# EAGLE board trigger_in_board (EAGLE 9.5.1)
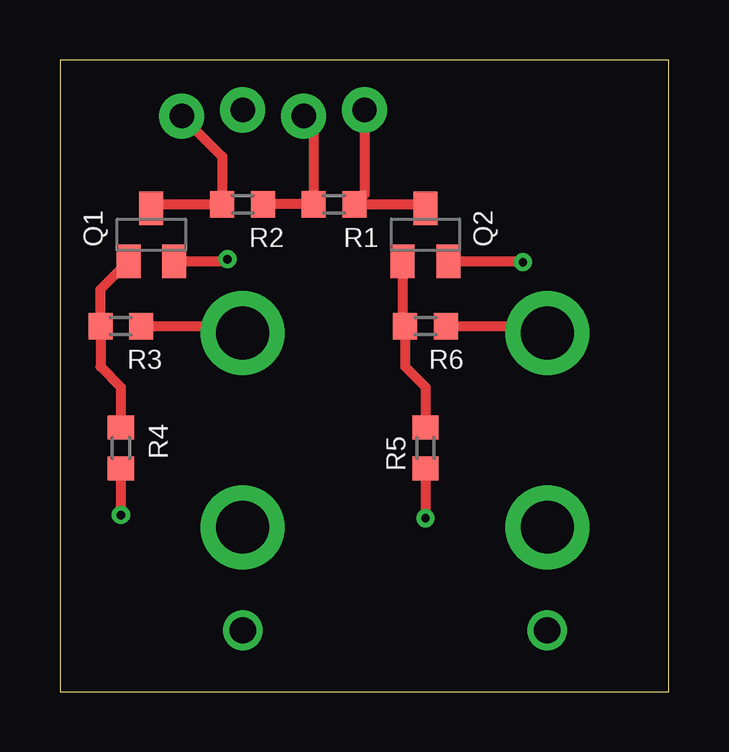
[diagram p0: board, top side]
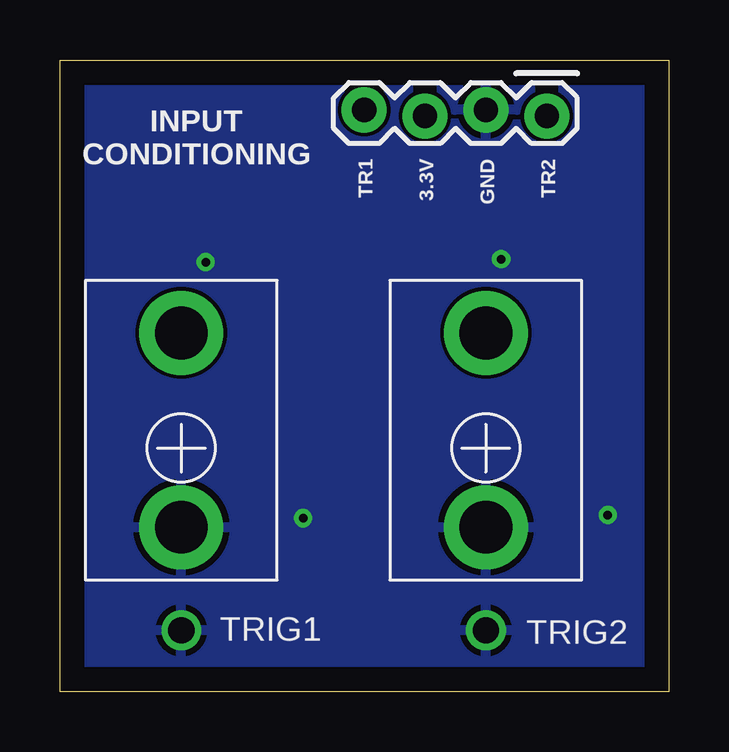
[diagram p1: board, bottom side, seen from below]

Size 25.38 x 26.34 mm. Coordinates in mm from the lower left corner, seen from the top.
Outline: 0,0 25.38,0 25.38,26.34 0,26.34 0,0
Copper layers (1*16): Top 0.035mm / dielectric 1.5mm / Bottom 0.035mm
Design rules "default": minimum track width 6mil, minimum drill 0.35mm, track to track 6mil, track to pad 6mil, pad to pad 6mil, via to via 6mil, smd to smd 6mil, copper to edge 40mil, drill to drill 6mil, minimum pad ring 10mil, minimum via ring 8mil, stop-mask expansion 4mil, vias tented up to drill 0mil, thermal gap 10mil

## Footprints (pad centres in the part's own frame; a part is rotated, then mirrored left to right if it is on the bottom)
1X04_LOCK = drill 1.016 pad 1.88: 1 0,0.127; 2 2.54,-0.127; 3 5.08,0.127; 4 7.62,-0.127
TRANSISTOR_SOT23-BEC = smd 1 x 1.4: B -0.95,-1.1; C 0,1.1; E 0.95,-1.1
R0603 = smd 1 x 1.1: 1 -0.85,0; 2 0.85,0
KOBICONN_PJM301DM_JACK = drill 2.2 pad 3.5: P$1 0,4.8; P$2 0,-3.3 | drill 1.1: P$3 0,-7.6

## Placement (x,y rotation side)
J1  [1X04_LOCK]  5.08,24.13 180 bottom
Q1  MMBT3904LT1G  [TRANSISTOR_SOT23-BEC]  3.81,19.05 0 top
Q2  MMBT3904LT1G  [TRANSISTOR_SOT23-BEC]  15.24,19.05 0 top
R1  47k  [R0603]  11.43,20.32 180 top
R2  47k  [R0603]  7.62,20.32 0 top
R3  100k  [R0603]  2.54,15.24 0 top
R4  33k  [R0603]  2.54,10.16 270 top
R5  33k  [R0603]  15.24,10.16 270 top
R6  100k  [R0603]  15.24,15.24 0 top
TRIG1  [KOBICONN_PJM301DM_JACK]  20.32,10.16 0 bottom
TRIG2  [KOBICONN_PJM301DM_JACK]  7.62,10.16 0 bottom

## Library data of the parts
J1 = SparkFun-Connectors; PROD_ID: CONN-09696
Q1 Q2 = braids_v50
R1-R6 = rcl; SPICEPREFIX: R
TRIG1 TRIG2 = 0000-master

## Nets
3V3_D: J1.3 R1.2 R2.2
GND: J1.2 Q1.E Q2.E R4.2 R5.2 TRIG1.P$2 TRIG1.P$3 TRIG2.P$2 TRIG2.P$3
N$18: R6.2 TRIG1.P$1
N$19: Q2.B R5.1 R6.1
N$20: R3.2 TRIG2.P$1
N$21: Q1.B R3.1 R4.1
TR1: J1.4 Q2.C R1.1
TR2: J1.1 Q1.C R2.1

## Tracks (layer width: path | path; a pad name or v marks a point on that pad's centre or on a via)
3V3_D
  Top 0.406: R2.2 R1.2 10.58,23.58 J1.3
GND  (via drill 0.35)
  Top 0.406: Q1.E 7.07,17.95 v6.99,18.03 | Q2.E 19.3,17.95 v19.3,17.91 | R5.2 v15.24,7.24 | R4.2 v2.54,7.37
  pour Bottom: 0,0 0,26.67 25.4,26.67 25.4,0
N$18
  Top 0.406: R6.2 20.32,15.24 TRIG1.P$1
N$19
  Top 0.406: Q2.B 14.29,15.34 R6.1 14.39,13.55 15.24,12.7 R5.1
N$20
  Top 0.406: R3.2 7.62,15.24 TRIG2.P$1
N$21
  Top 0.406: R4.1 2.54,12.7 1.69,13.55 R3.1 1.69,16.78 Q1.B
TR1
  Top 0.406: Q2.C 15.07,20.32 R1.1 12.7,20.74 J1.4
TR2
  Top 0.406: Q1.C 3.98,20.32 R2.1 6.77,22.31 J1.1

## Text on the board
bPlace: INPUT / CONDITIONING | TR2 | GND | 3.3V | TR1